# Altium PCB PCB1_sheet2.PcbDoc
Units mm, origin at the board's own origin, x right, y up, seen from the top; angles counter-clockwise.
Board outline 106.1 x 66.05 mm, 2 copper layers (Top Layer, Bottom Layer); 6 components, 7 nets, 52 pads, 4 vias.
Unrouted connection lines stored in the file: 2.
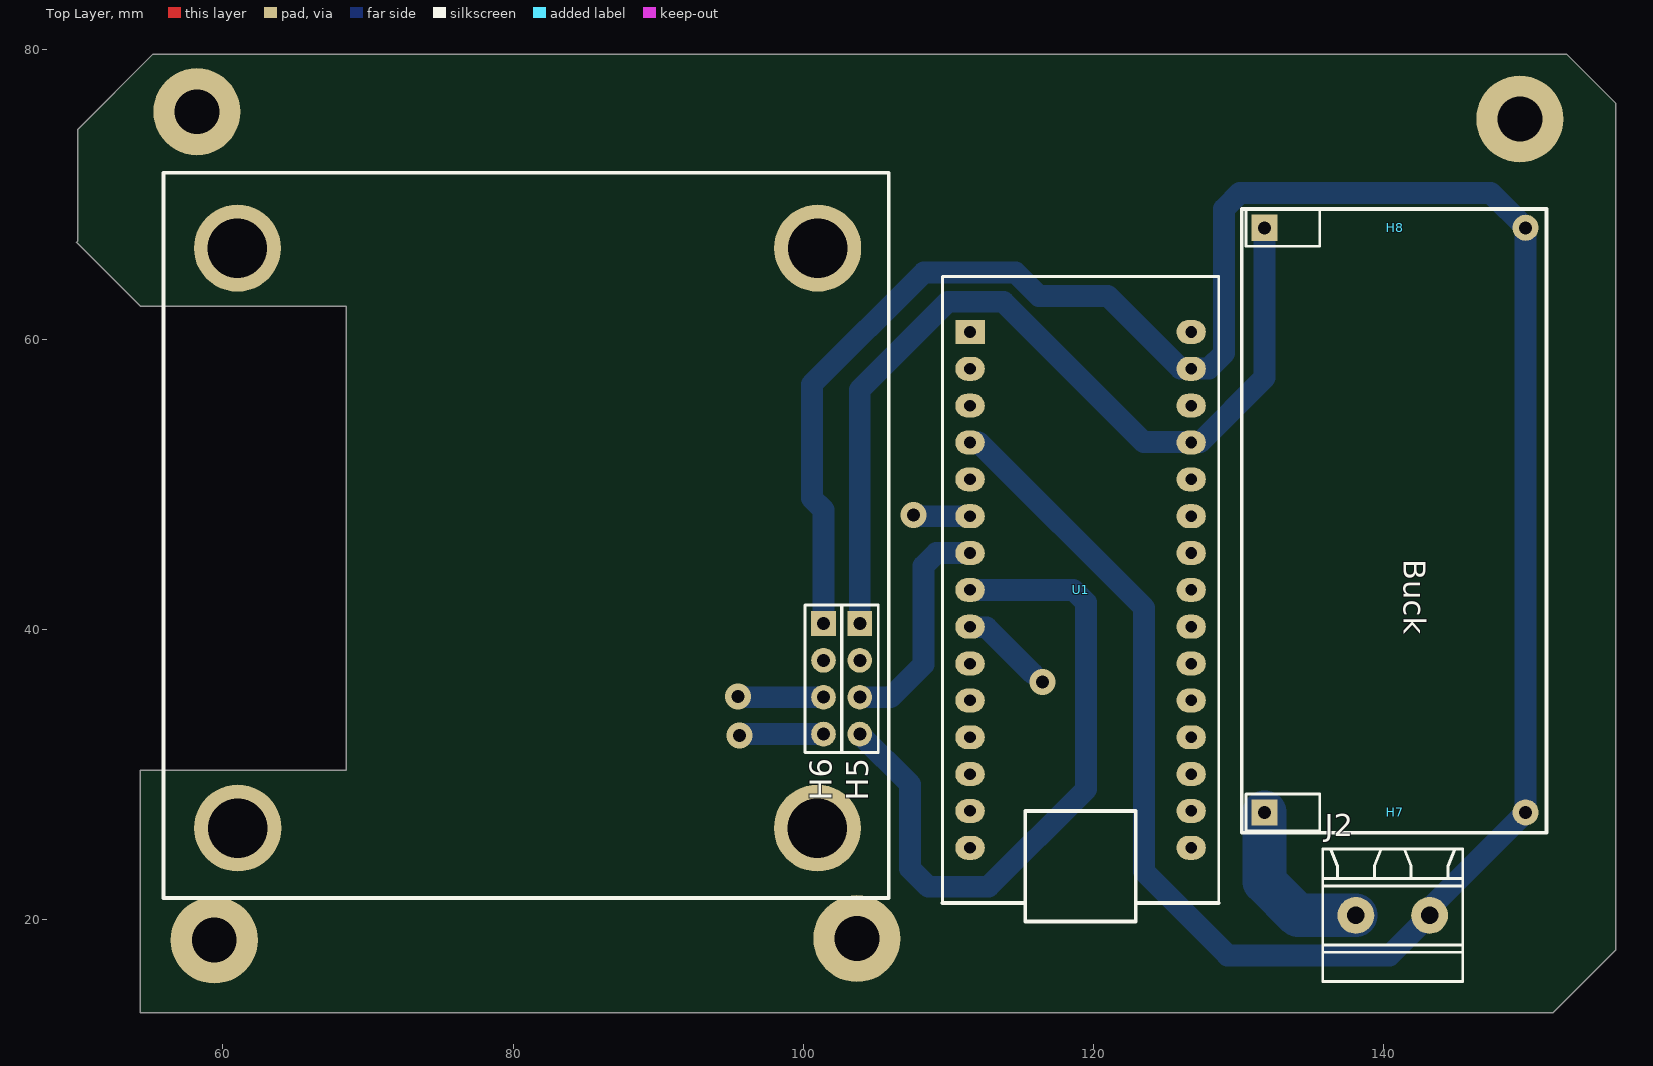
[diagram p0: Top Layer view]
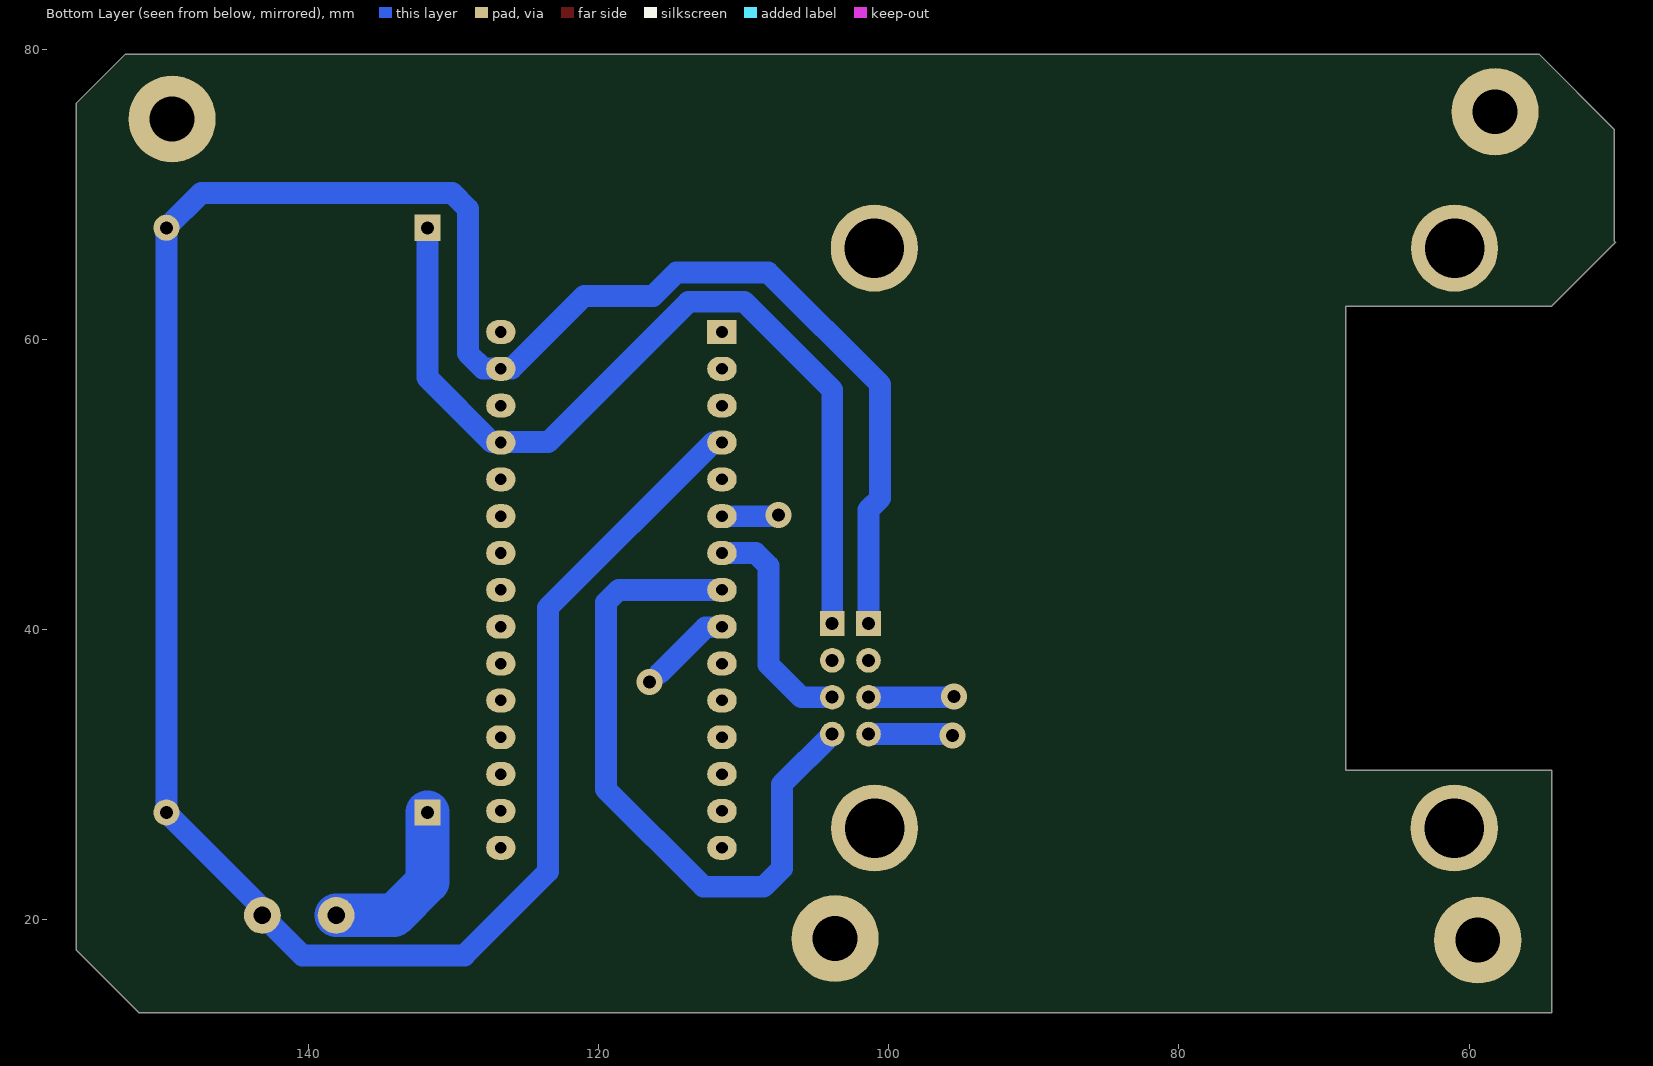
[diagram p1: Bottom Layer view, seen from below]

## Layer stack, top to bottom
Top Solder: solder mask 0.0102, Solder Resist, Dk 3.5
Top Layer: signal copper 0.0356
Dielectric 1: dielectric 0.32, FR-4, Dk 4.8
Bottom Layer: signal copper 0.0356
Bottom Solder: solder mask 0.0102, Solder Resist, Dk 3.5

## Board outline
54.3,13.6 54.3,30.3 68.5,30.3 68.5,62.3 54.3,62.3 49.9,66.7 50,66.8 50,74.5 55.15,79.65 152.65,79.65 156,76.3 156,17.9 151.7,13.6

## Design rules (kind name [scope] priority, off if disabled: settings)
Clearance [All] p1: gap=0.508 ignorepadtopadclearanceinfootprint=FALSE
ComponentClearance [All] p1 off: gap=0.254 collisioncheckmode=3 verticalgap=0.254 showdistances=FALSE
FanoutControl Fanout_LCC [IsLCC] p2 off: bgadir=Out bgaviamode=Centered fanoutstyle=Auto fanoutdirection=Alternating viagrid=0.025 // Fanout_LCC (Default Rule)
FanoutControl Fanout_SOIC [IsSOIC] p3 off: bgadir=Out bgaviamode=Centered fanoutstyle=Auto fanoutdirection=Alternating viagrid=0.025 // Fanout_SOIC (Default Rule)
FanoutControl Fanout_Small [(CompPinCount < 5)] p4 off: bgadir=Out bgaviamode=Centered fanoutstyle=Auto fanoutdirection=OutThenIn viagrid=0.025 // Fanout_Small (Default Rule)
FanoutControl Fanout_Default [All] p5 off: bgadir=Out bgaviamode=Centered fanoutstyle=Auto fanoutdirection=Alternating viagrid=0.025 // Fanout_Default (Default Rule)
HoleToHoleClearance [All] p1 off: gap=0.254 allowstackedmicrovias=TRUE
MinimumSolderMaskSliver [All] p1 off: minsoldermaskwidth=0.254
PolygonConnect [All] p1: connectstyle=Relief reliefconductorwidth=0.254 reliefentries=4 polygonreliefangle="90 Angle" airgapwidth=0.254
RoutingVias [All] p1: holewidth=0.711 width=1.27 viastyle="Through Hole" minholewidth=0.711 minwidth=1.27 maxholewidth=0.711 maxwidth=1.27
SilkToSilkClearance [All] p1 off: silktosilkclearance=0.254
SilkToSolderMaskClearance [IsPad] p1 off: minsilkscreentomaskgap=0.254 clearancetoexposedcopper=TRUE
SolderMaskExpansion [All] p1 off: expansion=0.102 istentingtop=FALSE
Width [All] p1: maxlimit=3 minlimit=0.508 preferedwidth=0.508
21 further rules are at their usual default settings.

## Components (designator, comment, footprint, x,y, rotation, side; value= is the part's Value field where it differs from the comment)
H5 "Header 4" HDR1X4 103.9,40.42 r270 top
H6 "Header 4" HDR1X4 101.4,40.42 r270 top
H7 "Header 2" HDR1X2 131.8,27.4 r0 top
H8 "Header 2" HDR1X2 131.8,67.7 r0 top
J2 "Screw_5.08_2" ScrewTerm_2.54_2 138.1,20.3 r0 top
U1 "Arduino Nano" Arduino_NANO 111.5,60.52 r270 top

## Footprints (in the part's own frame and the unit in brackets; to place one, negate y for a bottom-side part, rotate by r counter-clockwise, add the part's x,y. Pads: shape width x height; smd on the part's side, far side on the other; paste and mask are expansions set on the pad)
Arduino_NANO [mil]
  rect 65x80 hole 31.5: 1(0,0)
  oval 65x80 hole 31.5: 2(100,0) 3(200,0) 4(300,0) 5(400,0) 6(500,0) 7(600,0) 8(700,0) 9(800,0) 10(900,0) 11(1000,0) 12(1100,0) 13(1200,0) 14(1300,0) 15(1400,0) 16(1400,600) 17(1300,600) 18(1200,600) 19(1100,600) 20(1000,600) 21(900,600) 22(800,600) 23(700,600) 24(600,600) 25(500,600) 26(400,600) 27(300,600) 28(200,600) 29(100,600) 30(0,600)
  silkscreen extent -150,-75 1600,675, body extent -150,-50 1615,650, height 465
HDR1X2 [mm]
  rect 1.8x1.8 hole 0.9: 1(0,0)
  round 1.8 hole 0.9: 2(18,0)
  silkscreen extent -1.27,-1.27 3.81,1.27
HDR1X4 [mm]
  rect 1.7x1.7 hole 0.9: 1(0,0)
  round 1.7 hole 0.9: 2(2.54,0) 3(5.08,0) 4(7.62,0)
  silkscreen extent -1.27,-1.27 8.89,1.27
ScrewTerm_2.54_2 [mm] "2-way 200 mil pitch screw terminal connector"
  round 2.54 hole 1.2: 1(0,0) 2(5.08,0)
  silkscreen extent -2.29,-4.57 7.37,4.58

## Part data
H5 H6: "Header, 4-Pin", Manufacturer="Generic Components", Class=Connector
H7 H8: "Header, 2-Pin", Manufacturer="Generic Components", Class=Connector
J2: "2 way screw terminal connector"
U1: "DIL Arduino Nano", Publisher="Altium Limited", Revision="17-Jul-2002: Re-released for DXP Platform."

## Free pads (board coordinates)
  round 6 hole 3.1: 0(59.4,18.6) 0(103.7,18.7) 2(58.2,75.7) 3(149.4,75.2)
  round 6 hole 4.1: 0(61,66.3) 0(61.02,26.32) 0(100.98,26.32) 0(101,66.3)

## Via types
v1: diameter 1.8, hole 0.9, Top Layer to Bottom Layer, 4 vias

## Nets (pads, with @x,y where several pads share a name; then routed paths per layer and width w, separated by ;. In a path a pad name is that pad's centre, name@x,y a point inside that pad or via, vN(x,y) a via of type N, cw(c..) or ccw(c..) an arc to the next point about the centre after c; other vN are vias at no path point)
+5: H5.1 H8.1 U1.27 | length 62.7
  Bottom Layer w1.5: H5.1 103.9,56.541 109.963,62.604 113.805,62.604 123.48,52.929 126.711,52.929 U1.27 126.769,52.929 127.366,52.929 131.8,57.363 H8.1
+12: H7.1 J2.1 | length 12
  Bottom Layer w3: H7.1 131.8,22.621 134.121,20.3 J2.1
GND: H6.1 H7.2 H8.2 J2.2 U1.4 U1.29 | length 191.8
  Bottom Layer w1.5: H6.1 101.4,48.26 100.6,49.06 100.6,56.9 108.312,64.612 114.637,64.612 116.248,63 121,63 125.991,58.009 126.711,58.009 U1.29 126.769,58.009 127.975,58.009 129.014,59.048 129.014,69.014 130.1,70.1 147.4,70.1 H8.2 H7.2 143.379,20.979 143.379,20.499 J2.2 140.422,17.542 129.258,17.542 123.5,23.3 123.5,41.497 112.097,52.9 U1.4@111.731,52.9
NetH5_3: H5.3 U1.7 | length 15.6
  Bottom Layer w1.5: H5.3@103.954,35.34 106.04,35.34 108.3,37.6 108.3,44.401 109.179,45.28 U1.7
NetH5_4: H5.4 U1.8 | length 47.4
  Bottom Layer w1.5: H5.4 107.369,29.331 107.369,23.531 108.629,22.271 112.771,22.271 119.5,29 119.5,41.861 118.621,42.74 U1.8
NetH6_3: H6.3 U1.6 | length 9.2
  Bottom Layer w1.5: v1@95.9,35.4 95.96,35.34 H6.3 ; v1@107.9,47.9 107.98,47.82 U1.6
  other v1: 95.5,35.4 107.6,47.9
NetH6_4: H6.4 U1.9 | length 10.9
  Bottom Layer w1.5: v1@96.1,32.8 H6.4 ; U1.9 111.529,40.171 112.629,40.171 115.8,37
  other v1: 95.6,32.7 116.5,36.4
pads on no net: H5.2 H6.2 U1.1 U1.2 U1.3 U1.5 U1.10 U1.11 U1.12 U1.13 U1.14 U1.15 U1.16 U1.17 U1.18 U1.19 U1.20 U1.21 U1.22 U1.23 U1.24 U1.25 U1.26 U1.28 U1.30

## Silkscreen, mask and mechanical layers (free items; w line width, h text height)
Top Overlay:
  lines w0.254: 55.9,21.5 105.9,21.5 105.9,71.5 55.9,71.5 55.9,21.5 ; 130.24,26 151.24,26 151.24,69 130.24,69 130.24,26
  text "Buck" at 141.394,44.846 h1.52 r270
Mechanical 1:
  lines w0.254: 49.9,66.7 54.3,62.3 68.5,62.3 68.5,30.3 54.3,30.3 54.3,13.6 108.7,13.6 151.7,13.6 156,17.9 156,76.3 152.65,79.65 152.15,79.65 55.15,79.65 50,74.5 50,66.8